# Altium PCB board.PcbDoc
Units mm, origin at the board's own origin, x right, y up, seen from the top; angles counter-clockwise.
Board outline 26.5 x 37 mm, 2 copper layers (Top Layer, Bottom Layer), stack 0.77 mm thick; 32 components, 10 nets, 83 pads, 34 vias.
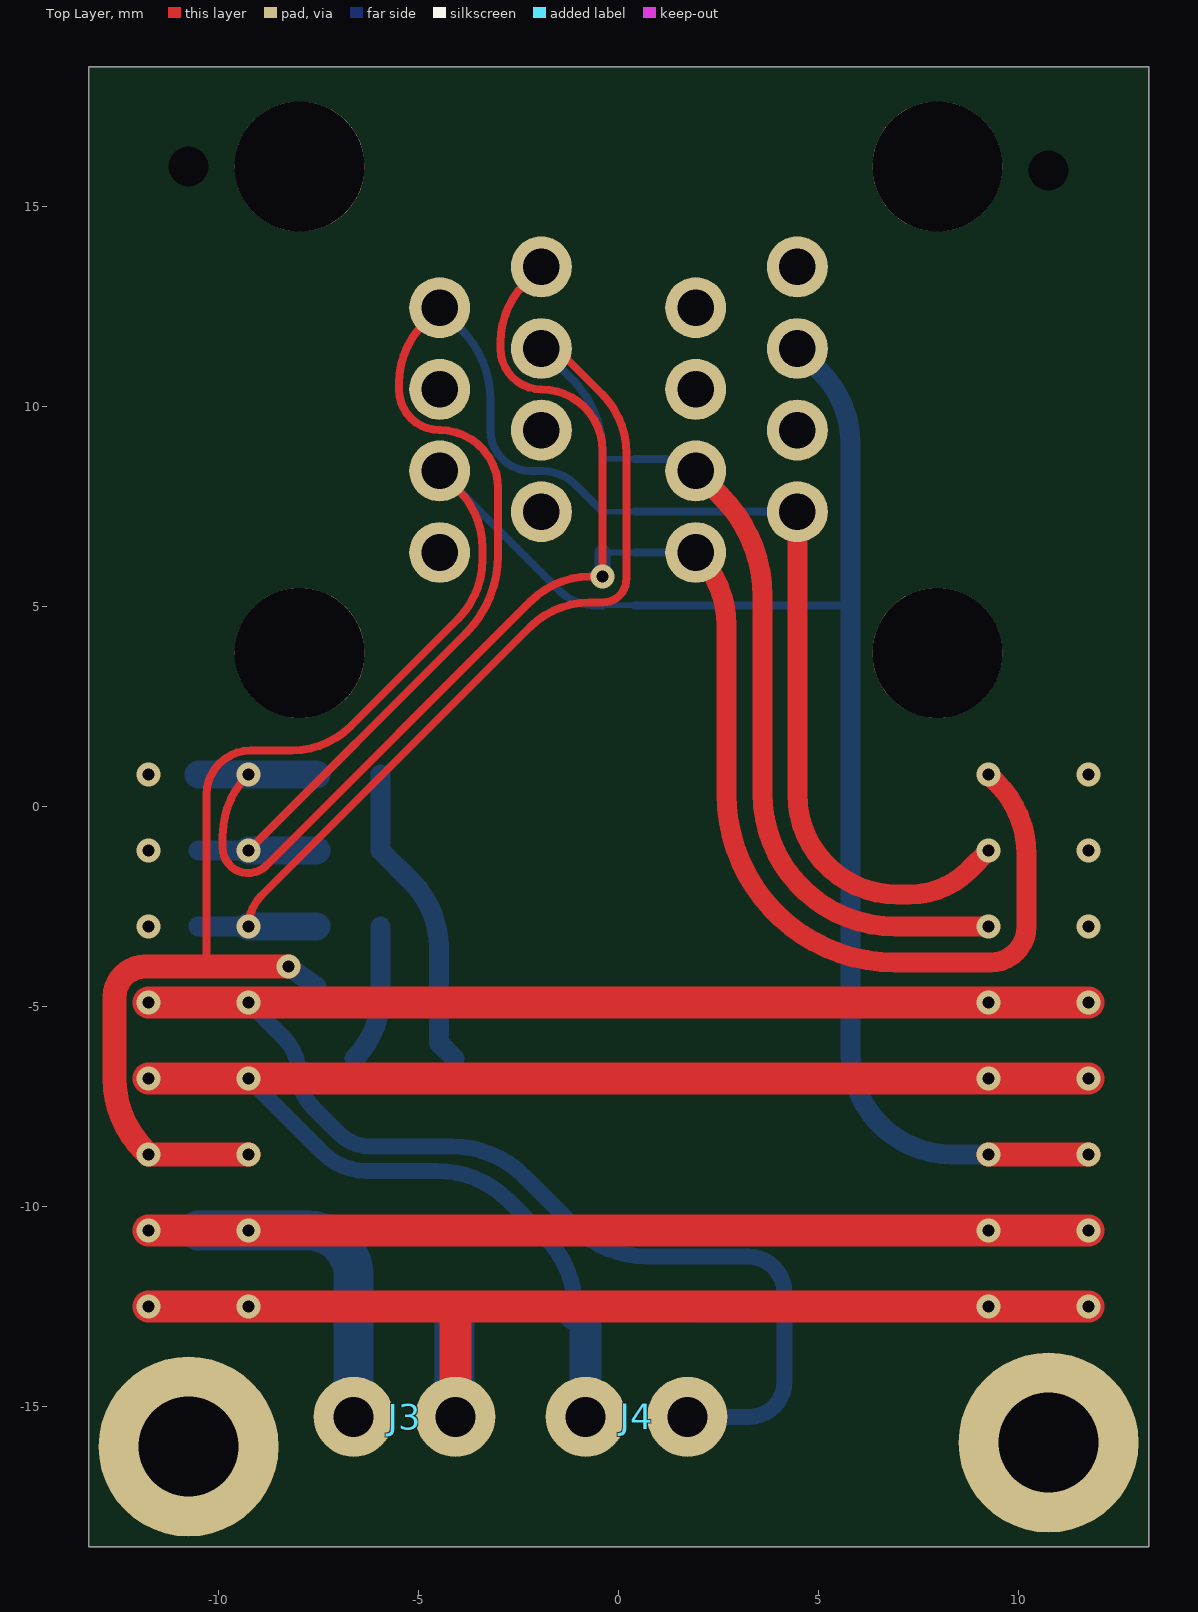
[diagram p0: Top Layer view]
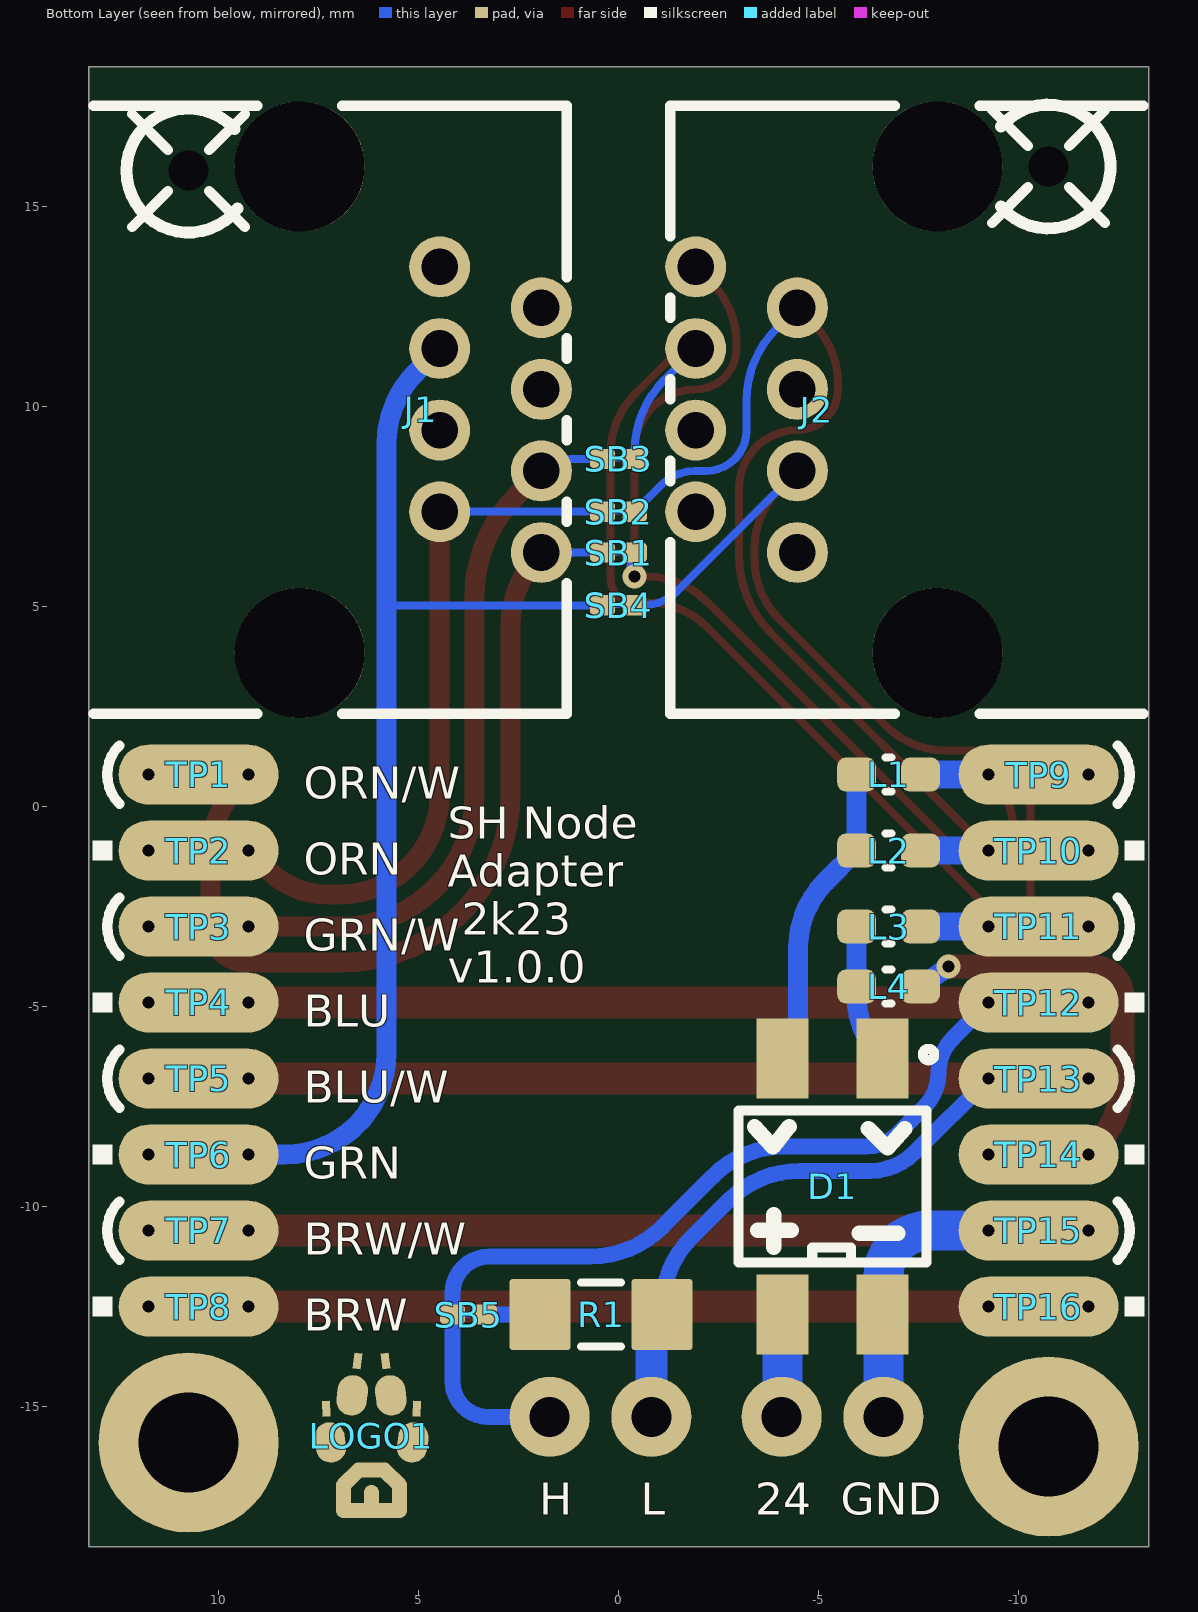
[diagram p1: Bottom Layer view, seen from below]
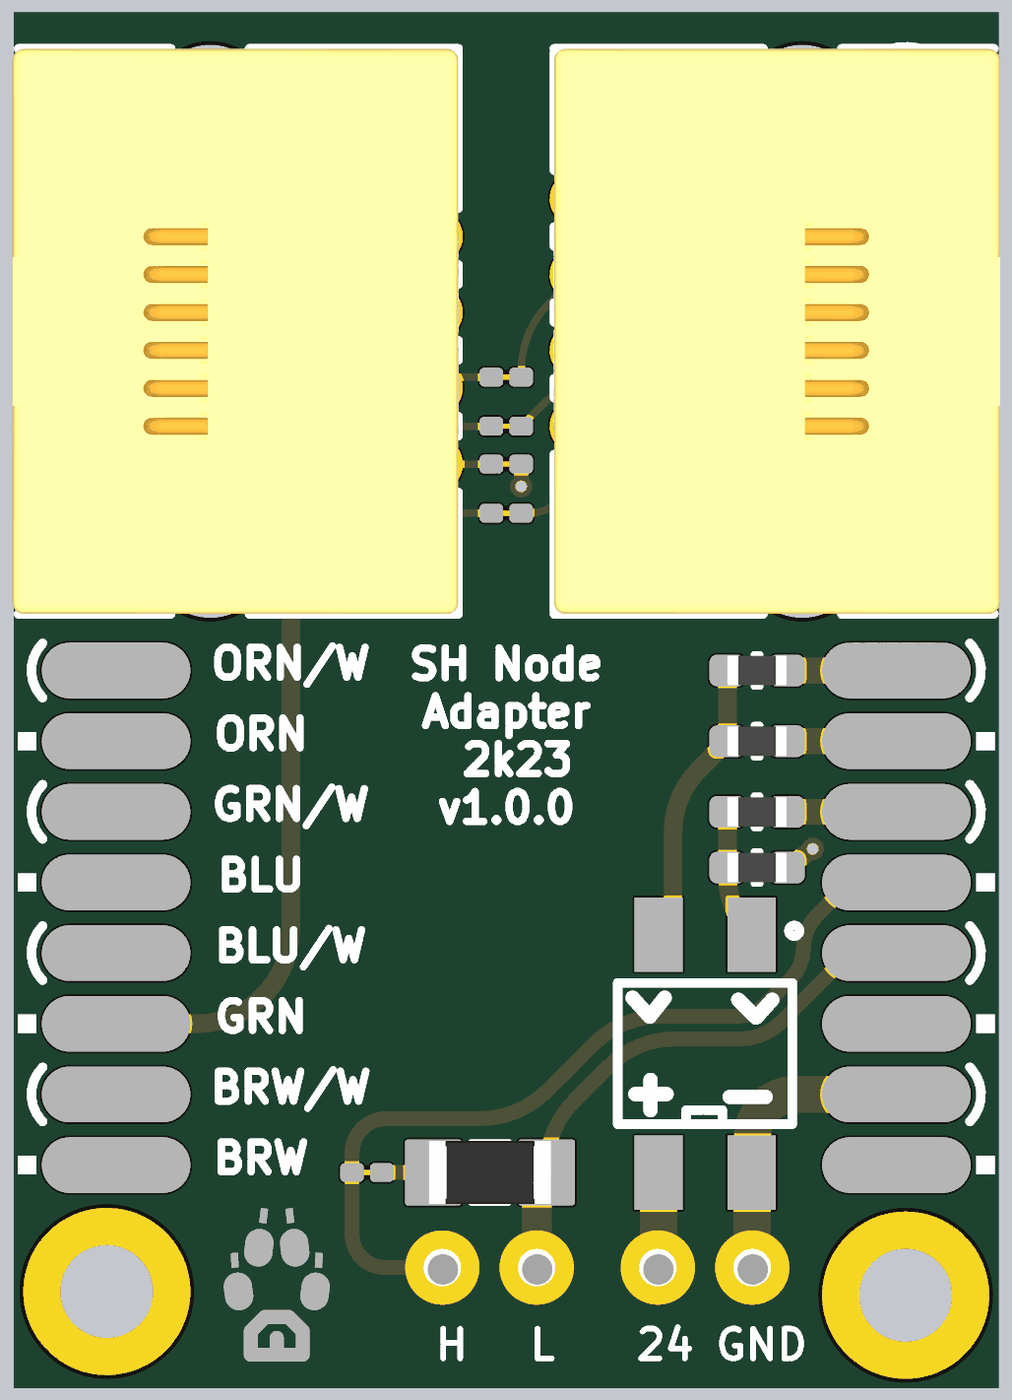
[diagram p2: 3D render of the assembled board from below, using the file's embedded part models]

## Layer stack, top to bottom
Top Solder: solder mask 0.0127, Solder Resist, Dk 3.8
Top Layer: signal copper 0.035
Dielectric: core 0.7, FR-4, Dk 4.5
Bottom Layer: signal copper 0.035
Bottom Solder: solder mask 0.0127, Solder Resist, Dk 3.8

## Board outline
-13.25,-18.5 13.25,-18.5 13.25,18.5 -13.25,18.5

## Design rules (kind name [scope] priority, off if disabled: settings)
AcuteAngle [All] p1: minimum=6.00000000000000E+0001 checktracksonly=FALSE
Clearance Clearance_1 [All] p1: gap=0.25 ignorepadtopadclearanceinfootprint=FALSE except(0.13: Arc-Arc Arc-Track Arc-SMDPad Arc-Via Track-Track Track-SMDPad Track-Via SMDPad-SMDPad SMDPad-Via THPad-Via Via-Via; 0.15: Arc-THPad Arc-Text Arc-Hole Track-THPad Track-Text Track-Hole SMDPad-THPad SMDPad-Text SMDPad-Hole THPad-THPad THPad-Text THPad-Hole Via-Text Via-Hole Fill-Text Fill-Hole Poly-Text Poly-Hole Region-Text Region-Hole Text-Text Text-Hole)
ComponentClearance ComponentClearance_1 [HasFootprint('CONN_DG308-2.54-2P') vs HasFootprint('CONN_DG308-2.54-2P')] p1: gap=-1 collisioncheckmode=3 verticalgap=2540 showdistances=FALSE
ComponentClearance ComponentClearance_3 [HasFootprint('HDR-1X4') OR HasFootprint('TP2030_SMD')] p2: gap=-1 collisioncheckmode=3 verticalgap=2540 showdistances=FALSE
ComponentClearance ComponentClearance_2 [HasFootprint('TP_TH_S0')] p3: gap=-1 collisioncheckmode=3 verticalgap=2540 showdistances=FALSE
ComponentClearance [All] p4: gap=0.3 collisioncheckmode=3 verticalgap=0.254 showdistances=FALSE
HoleSize [All] p1: absolutevalues=TRUE maxlimit=6 minlimit=0.2 maxpercent=80.000 minpercent=20.000
HoleToHoleClearance HoleToHoleClearance_1 [IsVia vs IsThruPin] p1: gap=0.7 allowstackedmicrovias=TRUE
HoleToHoleClearance [All] p2: gap=0.5 allowstackedmicrovias=TRUE
MinimumSolderMaskSliver [All] p1 off: minsoldermaskwidth=0.254
PlaneClearance [All] p1: clearance=0.45
PlaneConnect [All] p1: planeconnectstyle=Direct reliefexpansion=0.3 reliefentries=4 reliefconductorwidth=0.381 reliefairgap=0.178
PolygonConnect [All] p1: connectstyle=Direct reliefconductorwidth=0.381 reliefentries=4 polygonreliefangle="90 Angle" airgapwidth=0.356
RoutingVias [All] p1: holewidth=0.3 width=0.6 viastyle="Through Hole" minholewidth=0.2 minwidth=0.45 maxholewidth=0.9 maxwidth=1.27
SilkToSilkClearance [All] p1 off: silktosilkclearance=0.254
SilkToSolderMaskClearance [IsPad] p1 off: minsilkscreentomaskgap=0.254 clearancetoexposedcopper=TRUE
SolderMaskExpansion [All] p1: expansion=0.102 istentingtop=FALSE
UnRoutedNet [All] p1: checkbadconnections=TRUE
Width [All] p1: maxlimit=3.81 minlimit=0.14 preferedwidth=0.254
21 further rules are at their usual default settings.

## Components (designator, comment, footprint, x,y, rotation, side; value= is the part's Value field where it differs from the comment)
D1 "MB10F-D" MINIDIP_4P-L4.7-W3.8-P2.50-LS7.0-BL -5.35,-9.5 r0 bottom
J1 "MJ5388-Y011-HRN1" RJ45-TH_MJ5388-Y011-HRN1 3.2,9.92 r270 bottom
J2 "MJ5388-Y011-HRN1" RJ45-TH_MJ5388-Y011-HRN1 -3.2,9.92 r90 bottom
J3 "24V" CONN_DG308-2.54-2P -5.35,-15.256 r0 top
J4 "CAN" CONN_DG308-2.54-2P 0.45,-15.256 r0 top
L1 "BEAD" L0603 -6.75,0.8 r180 bottom
L2 "BEAD" L0603 -6.75,-1.1 r180 bottom
L3 "BEAD" L0603 -6.75,-3 r180 bottom
L4 "BEAD" L0603 -6.75,-4.5 r180 bottom
LOGO1 "LOGO" LOGO 6.176,-17.6 r180 bottom
R1 "120" R1206 0.438,-12.7 r180 bottom
SB1 "Circuit Breaker" JMP0402_2 0,6.35 r180 bottom
SB2 "Circuit Breaker" JMP0402_2 0,7.37 r180 bottom
SB3 "Circuit Breaker" JMP0402_2 0,8.69 r180 bottom
SB4 "Circuit Breaker" JMP0402_2 0,5.03 r180 bottom
SB5 "Circuit Breaker" JMP0402_2 3.75,-12.7 r180 bottom
TP1 "" TP2030_SMD 10.5,0.8 r90 bottom
TP2 "" TP2030_SMD 10.5,-1.1 r90 bottom
TP3 "" TP2030_SMD 10.5,-3 r90 bottom
TP4 "" TP2030_SMD 10.5,-4.9 r90 bottom
TP5 "" TP2030_SMD 10.5,-6.8 r90 bottom
TP6 "" TP2030_SMD 10.5,-8.7 r90 bottom
TP7 "" TP2030_SMD 10.5,-10.6 r90 bottom
TP8 "" TP2030_SMD 10.5,-12.5 r90 bottom
TP9 "" TP2030_SMD -10.5,0.8 r90 bottom
TP10 "" TP2030_SMD -10.5,-1.1 r90 bottom
TP11 "" TP2030_SMD -10.5,-3 r90 bottom
TP12 "" TP2030_SMD -10.5,-4.9 r90 bottom
TP13 "" TP2030_SMD -10.5,-6.8 r90 bottom
TP14 "" TP2030_SMD -10.5,-8.7 r90 bottom
TP15 "" TP2030_SMD -10.5,-10.6 r90 bottom
TP16 "" TP2030_SMD -10.5,-12.5 r90 bottom

## Footprints (in the part's own frame and the unit in brackets; to place one, negate y for a bottom-side part, rotate by r counter-clockwise, add the part's x,y. Pads: shape width x height; smd on the part's side, far side on the other; paste and mask are expansions set on the pad)
CONN_DG308-2.54-2P [mm]
  round 2 hole 1 mask+0: 1(1.27,0) 2(-1.27,0)
  body extent -2.92,-3.05 2.88,2.97, height 7.83
JMP0402_2 [mm] "Chip Capacitor Body"
  rrect50% 0.635x0.508 smd mask+0.05: 1(-0.4,0) 2(0.4,0)
  body extent -0.1,-0.1 0.1,0.1, height 0.01
L0603 [mil] "Chip Inductor"
  rrect50% 38x33.46 smd mask+1.97: 1(-31.5,0) 2(31.5,0)
  silkscreen extent -3,-17 3,17, body extent -31,-16 31,16, height 31
LOGO [mil]
  rect 15.75x7.87 smd rot 93 mask+4: ""(-44.55,100)
  oval 30x40 smd rot 8 mask+4: ""(-40.55,67)
  oval 15x39.5 smd mask+4: ""(-27.5,12.5) ""(27.5,12.5)
  oval 15x36.21 smd rot 135 mask+4: ""(-20,32.5)
  oval 30x40 smd rot 173 mask+4: ""(-18.99,113.27)
  rect 15.75x7.87 smd rot 83 mask+4: ""(-13.91,147.15)
  oval 70x15 smd mask+4: ""(0,0)
  oval 15x32.5 smd mask+4: ""(0,9)
  oval 39.5x15 smd mask+4: ""(0,40)
  rect 15.75x7.87 smd rot 97 mask+4: ""(13.91,147.15)
  oval 30x40 smd rot 7 mask+4: ""(18.99,113.27)
  oval 15x36.21 smd rot 45 mask+4: ""(20,32.5)
  oval 30x40 smd rot 172 mask+4: ""(40.55,67)
  rect 15.75x7.87 smd rot 87 mask+4: ""(44.55,100)
MINIDIP_4P-L4.7-W3.8-P2.50-LS7.0-BL [mm]
  rect 1.3x2 smd paste+0 mask+0.051: 1(-1.25,-3.2) 2(1.25,-3.2) 3(1.25,3.2) 4(-1.25,3.2)
  silkscreen extent -2.54,-3.44 2.35,1.9, body extent -2.5,-2 2.5,2, height 1.7
R1206 [mil] "Chip Resistor"
  rrect10% 60x70 smd mask+1.97: 1(-60,0) 2(60,0)
  silkscreen extent -20,-31 20,31, body extent -65,-33 65,33, height 26
RJ45-TH_MJ5388-Y011-HRN1 [mil]
  round 60 hole 36 paste-99999 mask+1.97: 1(140.55,50) 2(100.39,-50) 3(60.24,50) 4(20.08,-50) 5(-20.08,50) 6(-60.24,-50) 7(-100.39,50) 8(-140.55,-50)
  round 127.95 hole 127.95 unplated paste-99999: ""(-239.37,-187.8) ""(239.37,-187.8)
  silkscreen extent -299,-391 299,75, body extent -299,-397 299,76, height 455
TP2030_SMD [mm] "TP30_SMD"
  oval 1.5x4 smd mask+0.05: 1(0,0)

## Part data
D1: LCSC part number=C908753, P/N=MB10F-D
J1 J2: library part MJ88H-B011-HLRV1-1P_C2689153
J3 J4: library part "CONN MOLEX HDR-M 1x4", "DG308-2.54-02P-14-00A(H)", LCSC part number=C699496, P/N=DG308-2.54-02P-14-00A(H)
L1 L2 L3 L4: library part BLM18AG601SN1D, "380mΩ ±25% 600Ω@100MHz 0603 Ferrite Beads", LCSC part number=C19330, P/N=BLM18AG601SN1D
R1: library part RES, "120 1206"
TP1 TP2 TP3 TP4 TP5 TP6 TP7 TP8 TP9 TP10 TP11 TP12 TP13 TP14 TP15 TP16: library part TP_Dup1

## Free pads (board coordinates)
  round 4.5 hole 2.5: M(-10.75,-16) M(10.75,-15.9)
  round 0 hole 1: M(-10.75,16) M(10.75,15.9)

## Via types
v1: diameter 0.6, hole 0.3, Top Layer to Bottom Layer, tented both sides, 34 vias

## Nets (pads, with @x,y where several pads share a name; then routed paths per layer and width w, separated by ;. In a path a pad name is that pad's centre, name@x,y a point inside that pad or via, vN(x,y) a via of type N, cw(c..) or ccw(c..) an arc to the next point about the centre after c; other vN are vias at no path point)
24V: D1.3 J3.1 TP8.1 TP16.1 | length 28.8
  Top Layer w0.8: v1(-11.75,-12.5) v1(-9.25,-12.5) -4.08,-12.5 ; J3.1 -4.08,-12.5 ; v1(11.75,-12.5) -4.08,-12.5
  Bottom Layer w1: D1.3 -4.1,-15.236 ccw(c-4.08,-15.236) J3.1
  other v1: 9.25,-12.5
CAN_H: J4.1 R1.1 SB5.1 SB5.2 TP4.1 TP12.1 | length 47.6
  Top Layer w0.8: v1(-11.75,-4.9) v1(9.25,-4.9) v1(11.75,-4.9)
  Bottom Layer w0.14: SB5.2 SB5.1
  Bottom Layer w0.4: v1(-9.25,-4.9) -8.357,-5.793 cw(c-9.218,-6.654) -8,-6.654 ccw(c-6.782,-6.654) -7.644,-7.515 ; -7.643,-7.516 -6.983,-8.176 ccw(c-6.2,-7.392) -6.2,-8.5 -4.152,-8.5 cw(c-4.152,-11.04) -2.356,-9.244 -1.094,-10.506 ccw(c0.702,-8.71) 0.702,-11.25 3.231,-11.25 cw(c3.231,-12.169) 4.15,-12.169 SB5.1 4.15,-14.37 cw(c3.264,-14.37) 3.264,-15.256 J4.1 ; R1.1 SB5.2
CAN_L: J4.2 R1.2 TP5.1 TP13.1 | length 37.3
  Top Layer w0.8: v1(-11.75,-6.8) v1(11.75,-6.8)
  Bottom Layer w0.4: v1(-9.25,-6.8) -7.397,-8.653 ccw(c-6.3,-7.556) -6.3,-9.107 -4.545,-9.107 cw(c-4.545,-11.647) -2.749,-9.851 -1.83,-10.77 cw(c-3.626,-12.566) -1.086,-12.566 R1.2
  Bottom Layer w0.8: R1.2 -0.82,-12.7 J4.2
  other v1: 9.25,-6.8
GND: D1.4 J3.2 TP7.1 TP15.1 | length 31.5
  Top Layer w0.8: v1(-11.75,-10.6) v1(9.25,-10.6) v1(11.75,-10.6)
  Bottom Layer w1: TP15.1 v1(-9.25,-10.6) -7.762,-10.6 cw(c-7.762,-11.742) -6.62,-11.742 -6.62,-12.7 J3.2
NetD1_1: D1.1 L3.1 L4.1 | length 3.5
  Bottom Layer w0.5: D1.1 ccw(c-8.17,-4.73) -5.95,-4.73 L4.1 L3.1
NetD1_2: D1.2 L1.1 L2.1 | length 7.8
  Bottom Layer w0.5: L1.1 L2.1 -5.181,-1.869 cw(c-6.846,-3.534) -4.491,-3.534 -4.491,-5.909 D1.2
NetJ1_1: J1.1 J2.1 L1.2 SB1.1 SB1.2 TP1.1 TP9.1 | length 51
  Top Layer w0.2: v1(-9.25,0.8) -9.277,0.773 ccw(c-7.786,-0.718) -9.895,-0.718 -9.895,-1.029 ccw(c-9.258,-1.029) -8.808,-1.479 -2.197,5.133 cw(c-0.706,3.642) -0.706,5.75 v1(-0.4,5.75) -0.4,8.9 ccw(c-1.93,8.9) -1.93,10.43 cw(c-1.93,11.45) -2.95,11.45 -2.95,11.597 cw(c-0.842,11.597) -2.333,13.087 J2.1
  Top Layer w0.5: J1.1 1.956,6.324 cw(c0.16,4.528) 2.7,4.528 2.7,0.311 ccw(c6.911,0.311) 6.911,-3.9 9.3,-3.9 ccw(c9.3,-3) 10.2,-3 10.2,-1.202 ccw(c7.66,-1.202) 9.456,0.594 v1(9.25,0.8)
  Bottom Layer w0.14: SB1.2 SB1.1
  Bottom Layer w0.2: SB1.1 J1.1
  Bottom Layer w0.4: v1(-0.4,5.75) SB1.2
  Bottom Layer w0.7: TP9.1 v1(-9.25,0.8) L1.2
  other v1: -11.75,0.8 11.75,0.8
NetJ1_2: J1.2 J2.2 L2.2 SB2.1 SB2.2 TP2.1 TP10.1 | length 46.5
  Top Layer w0.2: v1(-9.25,-1.1) -3.817,4.332 ccw(c-5.773,6.288) -3.007,6.288 -3.007,7.947 ccw(c-4.47,7.947) -4.47,9.41 cw(c-4.47,10.43) -5.49,10.43 -5.49,10.577 cw(c-3.382,10.577) -4.873,12.067 J2.2
  Top Layer w0.5: J1.2 4.47,0.303 ccw(c6.973,0.303) 6.973,-2.2 7.277,-2.2 ccw(c7.277,-0.092) 8.767,-1.583 v1(9.25,-1.1)
  Bottom Layer w0.14: SB2.2 SB2.1
  Bottom Layer w0.2: J2.2 -3.944,11.944 cw(c-5.74,10.148) -3.2,10.148 -3.2,9.4 ccw(c-2.19,9.4) -2.19,8.39 -1.914,8.39 cw(c-1.914,7.196) -1.07,8.04 SB2.2 ; SB2.1 J1.2
  Bottom Layer w0.5: TP10.1 v1(-9.25,-1.1)
  Bottom Layer w0.7: v1(-9.25,-1.1) L2.2
  other v1: -11.75,-1.1 11.75,-1.1
NetJ1_3: J1.3 J2.3 L3.2 SB3.1 SB3.2 TP3.1 TP11.1 | length 44.8
  Top Layer w0.2: v1(-9.25,-3) cw(c-8.164,-3) -8.932,-2.232 -2.217,4.483 cw(c-0.727,2.992) -0.727,5.1 -0.4,5.1 ccw(c-0.4,5.7) 0.2,5.7 0.2,8.827 ccw(c-1.908,8.827) -0.417,10.317 -1.281,11.181 ccw(c-1.93,10.533) J2.3
  Top Layer w0.5: J1.3 2.566,7.754 cw(c0.069,5.258) 3.6,5.258 3.6,0.32 ccw(c6.92,0.32) 6.92,-3 v1(9.25,-3)
  Bottom Layer w0.14: SB3.2 SB3.1
  Bottom Layer w0.2: J2.3 -1.144,10.664 cw(c-2.94,8.868) -0.4,8.868 SB3.2 ; SB3.1 1.206,8.69 cw(c1.206,7.666) J1.3
  Bottom Layer w0.5: TP11.1 v1(-9.25,-3)
  Bottom Layer w0.7: v1(-9.25,-3) L3.2
  other v1: -11.75,-3 11.75,-3
NetJ1_6: J1.6 J2.6 L4.2 SB4.1 SB4.2 TP6.1 TP14.1 | length 67.3
  Top Layer w0.2: -10.3,-4 -10.3,0.3 cw(c-9.2,0.3) -9.2,1.4 -8.173,1.4 ccw(c-8.173,3.508) -6.683,2.017 -4.017,4.683 ccw(c-5.508,6.173) -3.4,6.173 -3.4,6.447 ccw(c-5.508,6.447) -4.017,7.937 J2.6
  Top Layer w0.3: v1@-11.856,-8.594 v1(-11.75,-8.7)
  Top Layer w0.6: v1@-11.856,-8.594 cw(c-10.06,-6.798) -12.6,-6.798 -12.6,-4.767 cw(c-11.833,-4.767) -11.833,-4 -10.3,-4 v1(-8.25,-4) ; v1(-11.75,-8.7) v1(-9.25,-8.7) ; v1(9.25,-8.7) v1(11.75,-8.7)
  Bottom Layer w0.14: SB4.2 SB4.1
  Bottom Layer w0.2: J2.6 -1.46,5.38 ccw(c-0.616,6.224) -0.616,5.03 SB4.2 ; SB4.1 5.8,5.03
  Bottom Layer w0.5: v1(-8.25,-4) L4.2 ; J1.6 5.056,10.864 cw(c3.26,9.068) 5.8,9.068 5.8,5.33 5.8,-6.16 ccw(c8.34,-6.16) 8.34,-8.7 TP6.1
pads on no net: J1. J1.4 J1.5 J1.7 J1.8 J2. J2.4 J2.5 J2.7 J2.8 LOGO1.

## Keep-outs
Keep-Out Layer:
  the board outline again, w0

## Silkscreen, mask and mechanical layers (free items; w line width, h text height)
Bottom Overlay:
  region: -12.65,-12.25 -13.15,-12.25 -13.15,-12.75 -12.65,-12.75
  region: -12.65,-8.45 -13.15,-8.45 -13.15,-8.95 -12.65,-8.95
  region: -12.65,-4.65 -13.15,-4.65 -13.15,-5.15 -12.65,-5.15
  region: -12.65,-0.85 -13.15,-0.85 -13.15,-1.35 -12.65,-1.35
  rectangle: 12.65,-1.35 13.15,-0.85
  rectangle: 12.65,-5.15 13.15,-4.65
  rectangle: 12.65,-8.95 13.15,-8.45
  rectangle: 12.65,-12.75 13.15,-12.25
  lines w0.254: -12.479,-11.329 cw(c-11.75,-10.6) -12.479,-9.871 ; -12.479,-7.529 cw(c-11.75,-6.8) -12.479,-6.071 ; -12.479,-3.729 cw(c-11.75,-3) -12.479,-2.271 ; -12.479,0.071 cw(c-11.75,0.8) -12.479,1.529 ; -12.164,14.586 -11.265,15.485 ; -12.164,17.414 -11.265,16.515 ; -10.235,15.485 -9.336,14.586 ; -10.235,16.515 -9.336,17.414 ; 9.336,14.486 10.235,15.385 ; 9.336,17.314 10.235,16.415 ; 11.265,15.385 12.164,14.486 ; 11.265,16.415 12.164,17.314 ; 12.479,-11.329 ccw(c11.75,-10.6) 12.479,-9.871 ; 12.479,-7.529 ccw(c11.75,-6.8) 12.479,-6.071 ; 12.479,-3.729 ccw(c11.75,-3) 12.479,-2.271 ; 12.479,0.071 ccw(c11.75,0.8) 12.479,1.529
  lines w0.3: -9.561,15.005 cw(c-10.75,16) -9.561,16.995 ; 9.525,14.95 ccw(c10.75,15.9) 12.3,15.9 ccw(c10.75,15.9) 9.597,16.936
  text "ORN/W" at 7.866,0.2 h0.8
  text "ORN" at 7.866,-1.7 h0.8
  text "GRN/W" at 7.866,-3.6 h0.8
  text "SH Node / Adapter  /  2k23 / v1.0.0" at 4.265,-4.4 h0.8
  text "BLU" at 7.866,-5.5 h0.8
  text "BLU/W" at 7.866,-7.4 h0.8
  text "GRN" at 7.866,-9.3 h0.8
  text "BRW/W" at 7.866,-11.2 h0.8
  text "BRW" at 7.866,-13.1 h0.8
  text "GND" at -5.554,-17.706 h0.8
  text "24" at -3.414,-17.706 h0.8
  text "L" at -0.553,-17.706 h0.8
  text "H" at 1.987,-17.706 h0.8

## Dimensions
-13.25,-18.5 to -13.25,18.5 on Mechanical 1
-13.25,-18.5 to 13.25,-18.5 on Mechanical 1